# Altium PCB PCB2.PcbDoc
Units mil, origin at the board's own origin, x right, y up, seen from the top; angles counter-clockwise.
Board outline 3426.02 x 1894.97 mil, 2 copper layers (Top Layer, Bottom Layer); 18 components, 10 nets, 53 pads, 0 vias.
Unrouted connection lines stored in the file: 5.
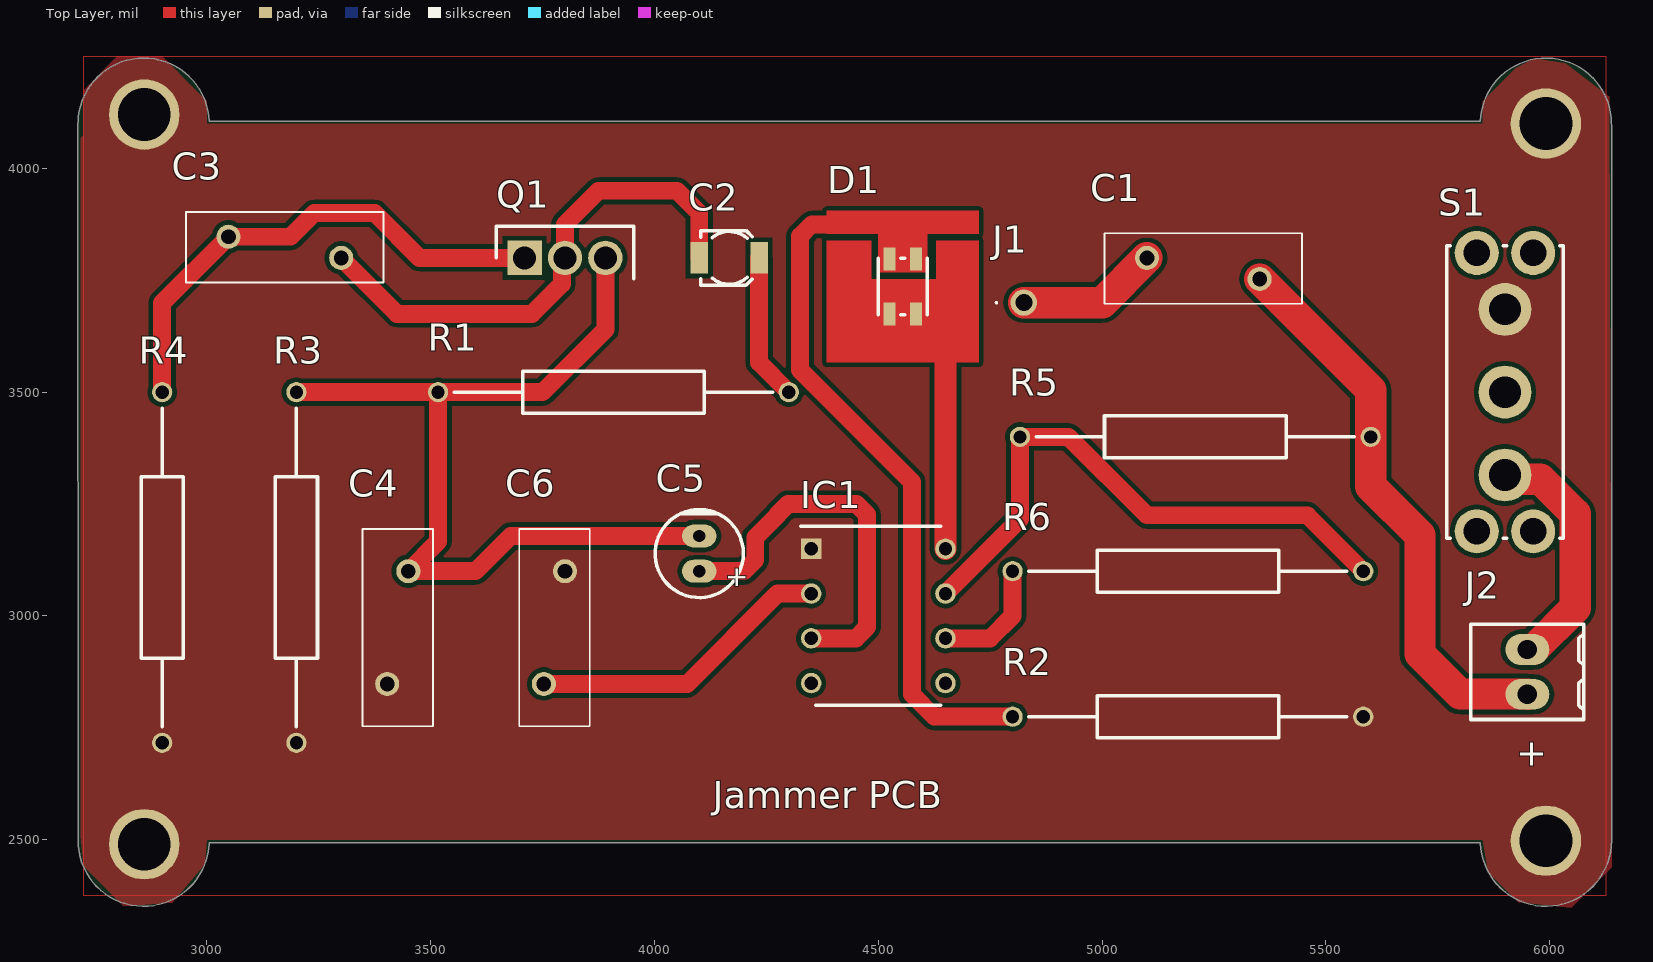
[diagram p0: Top Layer view]
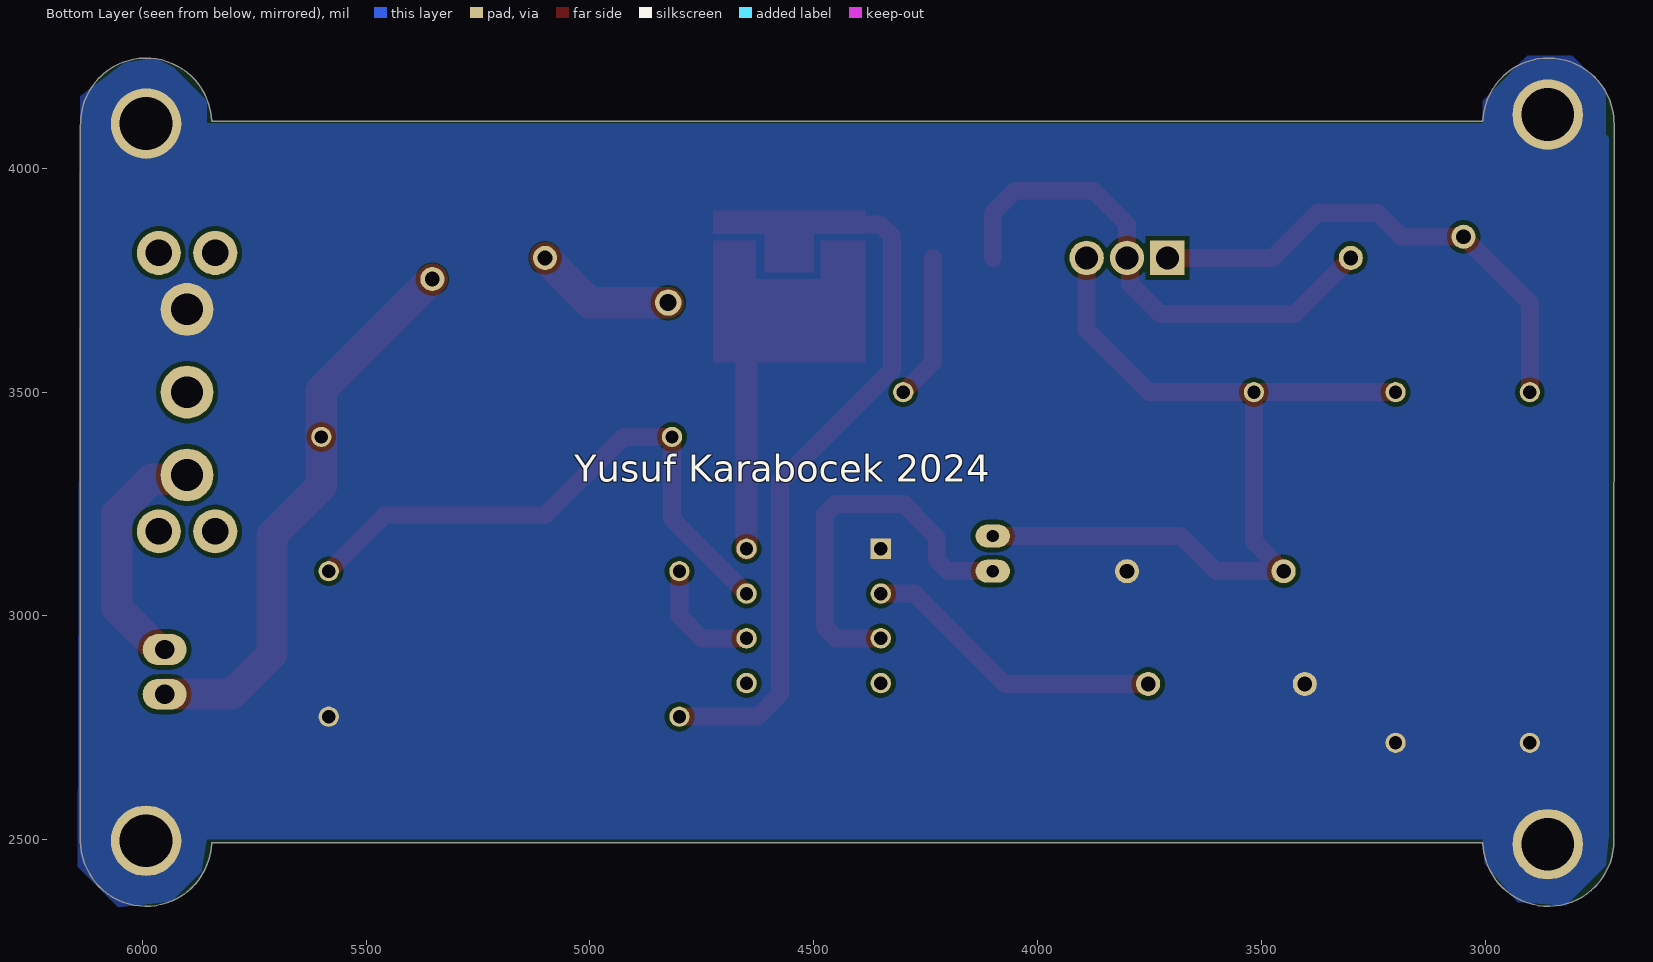
[diagram p1: Bottom Layer view, seen from below]
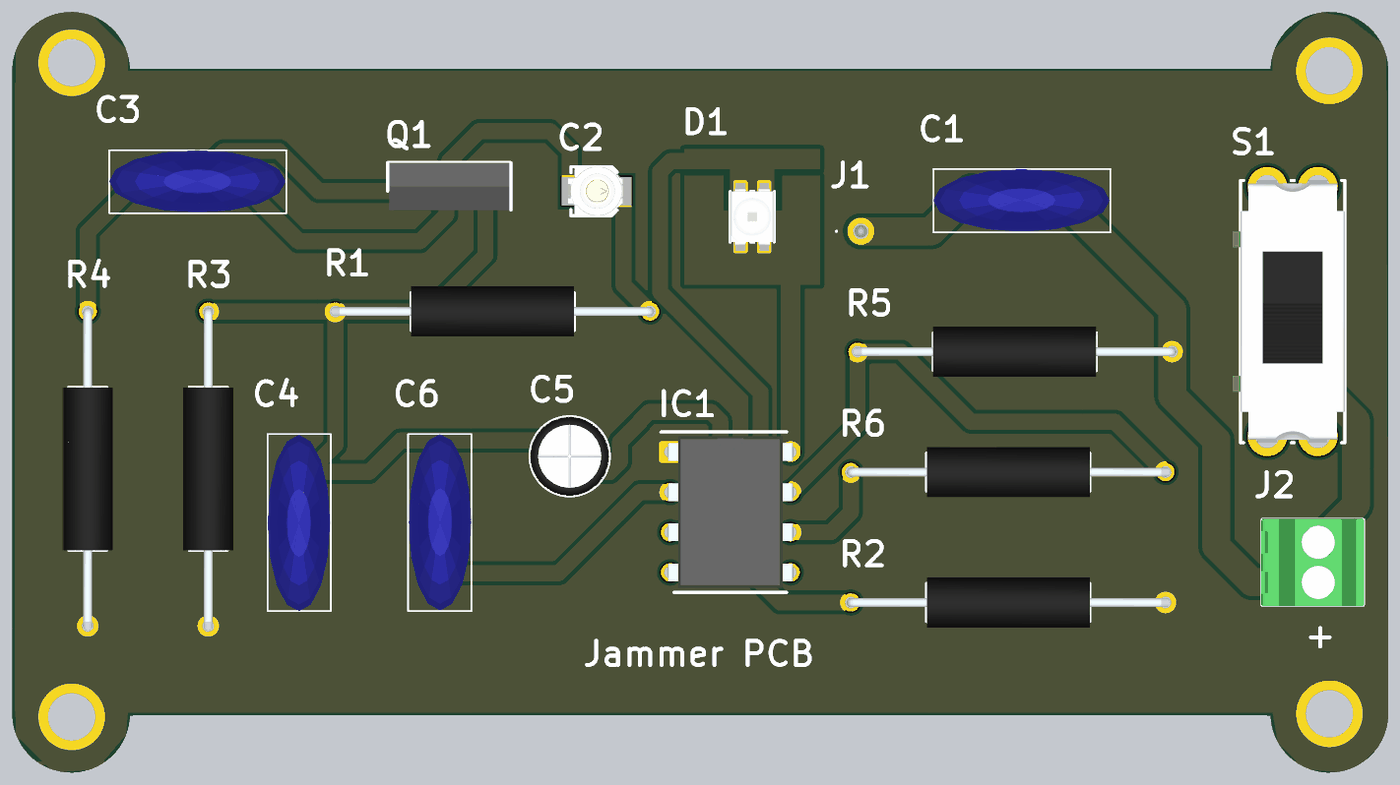
[diagram p2: 3D render of the assembled board from above, using the file's embedded part models]

## Layer stack, top to bottom
Top Solder: solder mask 0.4, Solder Resist, Dk 3.5
Top Layer: signal copper 1.4
Dielectric 1: dielectric 12.6, FR-4, Dk 4.8
Bottom Layer: signal copper 1.4
Bottom Solder: solder mask 0.4, Solder Resist, Dk 3.5

## Board outline
2712.14,2497.79 ccw(c2858.58,2497.79) 3004.93,2492.78 5845.23,2492.78 ccw(c5991.58,2497.79) 6138.01,2497.79 6138.01,4097.79 6137.86,4100 ccw(c5991.42,4100) 5845.07,4105.02 3004.93,4105.02 ccw(c2858.58,4100) 2712.19,4103.61 2711.99,4102.21

## Design rules (kind name [scope] priority, off if disabled: settings)
Clearance [All] p1: gap=10 ignorepadtopadclearanceinfootprint=FALSE except(0: Arc-Hole Track-Hole SMDPad-Hole THPad-Hole Via-Hole Fill-Hole Poly-Hole Region-Hole Text-Hole)
PolygonConnect [All] p1: connectstyle=Direct reliefconductorwidth=10 reliefentries=4 polygonreliefangle="90 Angle" airgapwidth=10
RoutingVias [All] p1: holewidth=28 width=50 viastyle="Through Hole" minholewidth=28 minwidth=50 maxholewidth=28 maxwidth=50
SolderMaskExpansion [All] p1: expansion=4 istentingtop=FALSE
Width [All] p1: maxlimit=100 minlimit=10 preferedwidth=10
30 further rules are at their usual default settings.

## Classes and differential pairs
component class Sheet1: C1 C2 C3 C4 C5 C6 D1 IC1 J1 Q1 R1 R2 R3 R4 R5 R6 S1

## Components (designator, comment, footprint, x,y, rotation, side; value= is the part's Value field where it differs from the comment)
C1 "4.7pF" 561R10TCCQ50 5100,3800 r0 top
C2 "JR300HV" "KNOWLES JR" 4166.93,3800 r180 top
C3 "2pF" 561R10TCCQ50 3048.03,3847.24 r0 top
C4 "47pF" 561R10TCCQ50 3402.76,2848.03 r90 top
C5 "1µF" "CAP TH ALUM ELEC D5.00mm S2.00mm H12.50mm" 4100,3139.37 r270 top
C6 "3.3pF" 561R10TCCQ50 3800,3100 r270 top
D1 "ASMT-QRBD-AEF0E" "Broadcom 4-PLLC 3228" 4554.53,3736.02 r0 top
IC1 "NE555N" DIP762W56P254L959H533Q8N 4500,3000 r0 top
J1 "Anten" M3902958360 4825,3700 r0 top
J2 "282834-2" "TE 282834-2" 5950,2875 r270 top
Q1 "2N4920G" TO229P300X760X1364-3P 3709.84,3800 r0 top
R1 "10k" RESAD1987W56L1031D239 3516.54,3500 r0 top
R2 "3.9k" RESAD1987W56L1031D239 5583.46,2775 r180 top
R3 "5.6k" RESAD1987W56L1031D239 3200,2716.54 r90 top
R4 "220" RESAD1987W56L1031D239 2900,2716.54 r90 top
R5 "6.8k" RESAD1987W56L1031D239 4816.54,3400 r0 top
R6 "82k" RESAD1987W56L1031D239 5583.46,3100 r180 top
S1 "MS12ASG13" "NKK MS12ASG13" 5900,3500 r90 top

## Footprints (in the part's own frame and the unit in brackets; to place one, negate y for a bottom-side part, rotate by r counter-clockwise, add the part's x,y. Pads: shape width x height; smd on the part's side, far side on the other; paste and mask are expansions set on the pad)
561R10TCCQ50 [mm]
  round 1.365 hole 0.84: 1(0,0) 2(6.4,-1.2)
  silkscreen extent -2.4,-2.6 8.8,1.4, body extent -2.41,-2.56 8.76,1.4, height 16.22
"Broadcom 4-PLLC 3228" [mm] "SOJ, 6-Leads, Body 3.20x2.80mm, IPC Medium Density"
  rect 0.7x1.3 smd paste-0.05 mask+0.1: 1(-0.75,-1.55) 1(0.75,-1.55) 2(-0.75,1.55) 2(0.75,1.55)
  Top Layer region: -1.4,0.8 1.4,0.8 1.4,3 4.3,3 4.3,4.3 -4.3,4.3 -4.3,3 -1.4,3
  Top Layer region: -4.3,2.6 -1.8,2.6 -1.8,0.4 1.9,0.4 1.9,2.6 4.3,2.6 4.3,-4.3 -4.3,-4.3
  silkscreen extent -1.4,-1.6 1.4,1.6, body extent -1.4,-1.8 1.4,1.8, height 2.1
"CAP TH ALUM ELEC D5.00mm S2.00mm H12.50mm" [mm] "5mm Diameter 2mm Lead Spacing Aluminum Electrolytic Capacitors Radial, Can"
  oval 1.3x1.95 hole 0.7: 1(1,0) 2(-1,0)
  silkscreen extent -2.5,-2.5 2.5,2.5, body extent -2.51,-2.5 2.5,2.5, height 12.5
DIP762W56P254L959H533Q8N [mm]
  rect 1.16x1.16 hole 0.76: 1(-3.81,3.81)
  round 1.16 hole 0.76: 2(-3.81,1.27) 3(-3.81,-1.27) 4(-3.81,-3.81) 5(3.81,-3.81) 6(3.81,-1.27) 7(3.81,1.27) 8(3.81,3.81)
  silkscreen extent -4.39,-5.08 3.55,5.08, body extent -3.95,-4.79 3.95,4.79, height 5.33
"KNOWLES JR" [mm] "CAP TRIMMER"
  rect 1x1.8 smd: 1(-1.7,0) 2(1.7,0)
  silkscreen extent -1.3,-1.55 1.63,1.55, body extent -1.65,-1.55 1.8,1.55, height 1.15
M3902958360 [mm]
  round 1.493 hole 0.96: 1(0,0)
  silkscreen extent -1.6,-0.05 -1.5,0.05, body extent -0.76,-0.77 0.76,0.77, height 5.87
"NKK MS12ASG13" [mm]
  round 3 hole 1.8: 1(-4.7,0) 2(0,0) 3(4.7,0)
  round 2.5 hole 1.5: M(-7.9,-1.6) M(-7.9,1.6) M(7.9,-1.6) M(7.9,1.6)
  silkscreen extent -8.3,-3.3 8.3,3.3, body extent -8.31,-3.3 8.31,3.81, height 13.41
RESAD1987W56L1031D239 [mm]
  round 1.15 hole 0.75: 1(0,0) 2(19.9,0)
  silkscreen extent 0.92,-1.19 18.97,1.19, body extent -0.28,-1.58 20.15,1.58, height 3.18
"TE 282834-2" [mm]
  oval 1.75x2.5 hole 1.1: 1(-1.27,0) 2(1.27,0)
  silkscreen extent -2.7,-3.2 2.7,3.2, body extent -2.77,-3.25 2.77,3.25, height 10
TO229P300X760X1364-3P [mm]
  rect 1.95x1.95 hole 1.3: 1(0,0)
  round 1.95 hole 1.3: 2(2.29,0) 3(4.58,0)
  silkscreen extent -1.61,-1.19 6.19,1.81, body extent -1.51,-1.19 6.09,1.81, height 12.76

## Part data
C1 C3 C4 C6: library part 561R10TCCQ50, "Capacitor", Manufacturer_Name=Vishay, Mouser Part Number=75-561R10TCCQ50, Datasheet Link=https://componentsearchengine.com/Datasheets/2/561R10TCCQ50.pdf, Height=11.2mm, Manufacturer_Part_Number=561R10TCCQ50, Mouser Price/Stock=https://www.mouser.co.uk/ProductDetail/Vishay-Cera-Mite/561R10TCCQ50?qs=XeJOwCSCkv8TfOZSduXdBA%3D%3D
C2: "CAP TRIMMER 5.5-30PF 350V SMD", Capacitance Range="5.5 ~ 30pF", Dielectric Material=Ceramic, manufacturer="Knowles Voltronics", Operating Temperature="-40°C ~ 85°C", Q @ Freq="200 @ 1MHz", Supplier Part Number 1=1674-JR300HV-ND, Adjustment Type=Top, componentlink1description=Datasheet, componentlink1url=https://www.knowlescapacitors.com/getattachment/727ef5bd-b9cf-4698-a84c-cd891d1f5273/JR-Series, componentlink2description="DigiKey Link", componentlink2url=https://www.digikey.com/en/products/detail/knowles-voltronics/JR300HV/17955420, Features="General Purpose", Height - Seated (Max)="0.045\" (1.15mm)", lastupdated="3.06.2024 20:26:22", Lifecycle Status=Active, Minimum Order=1, Mounting Type="Surface Mount", packaging=Bulk, Part Number=JR300HV, price=2.17, series=JR, Size / Dimension="0.138\" L x 0.122\" W (3.50mm x 3.10mm)", Supplier 1=DigiKey
C5: library part 860010772005, "CAP 1 UF 20% 63 V", Device Package="Radial, Can", Lifetime @ Temp.="2000 Hrs @ 85°C", manufacturer="Würth Elektronik", Operating Temperature="-40°C ~ 85°C", Ripple Current @ High Frequency="28.9mA @ 100kHz", Ripple Current @ Low Frequency="17mA @ 120Hz", Supplier Part Number 1=732-8762-1-ND, Tolerance=±20%, Voltage - Rated=63V, Applications="General Purpose", Capacitance=1µF, componentlink1description=Datasheet, componentlink1url=https://katalog.we-online.de/pbs/datasheet/860010772005.pdf, componentlink2description="DigiKey Link", componentlink2url=http://digikey.com/product-detail/en/w-rth-elektronik/860010772005/732-8762-1-ND/5728709, Height - Seated (Max)="0.492\" (12.50mm)", lastupdated="4.09.2020 23:29:02", Lead Spacing="0.079\" (2.00mm)", Lifecycle Status=Active, Minimum Order=1, Mounting Type="Through Hole", Package / Case="Radial, Can", packaging=TapeAndBox, Part Number=860010772005, Part Status=Active, partid=22163, Polarization=Polar, price=0.06, series=WCAP-ATG8, Size / Dimension="0.197\" Dia (5.00mm)", Supplier 1=DigiKey
D1: "LED INDICATOR 0.5W RED 4PLCC", Color=Red, Current - Max=300mA, Current - Test=150mA, Device Package=4-PLCC, Flux @ Current/Temperature - Test="16lm (12lm ~ 20lm)", Lumens/Watt @ Current - Test="43 lm/W", manufacturer="Broadcom Limited", Supplier Part Number 1=516-2679-1-ND, Temperature - Test=25°C, Voltage - Forward (Vf) (Typ)=2.5V, componentlink1description=Datasheet, componentlink1url=https://docs.broadcom.com/docs/AV02-1841EN, componentlink2description="DigiKey Link", componentlink2url=http://digikey.com/product-detail/en/broadcom-limited/ASMT-QRBD-AEF0E/516-2679-1-ND/3909187, Height - Seated (Max)="0.083\" (2.10mm)", lastupdated="24.04.2020 00:57:49", Lifecycle Status=Active, Minimum Order=1, Mounting Type="Surface Mount", Package / Case=4-PLCC, packaging=TapeAndReel, Part Number=ASMT-QRBD-AEF0E, Part Status=Active, price=0.42, Size / Dimension="0.126\" L x 0.110\" W (3.20mm x 2.80mm)", Supplier 1=DigiKey, Supplier Device Package=4-PLCC, Viewing Angle=120°, Wavelength="628nm (620nm ~ 635nm)"
IC1: "Integrated Circuit", Manufacturer_Name=HGSEMI, Datasheet Link=https://datasheet.lcsc.com/szlcsc/1906111919_HGSEMI-NE555N_C398063.pdf, Height=5.33mm, Manufacturer_Part_Number=NE555N
J1: library part M39029_58-360, "Connector", Arrow Part Number=M39029/58-360, Manufacturer_Name="TE Connectivity", Mouser Part Number=571-M39029/58-360, Arrow Price/Stock=https://www.arrow.com/en/products/m3902958-360/deutsch-group?region=nac, Datasheet Link=https://www.te.com/commerce/DocumentDelivery/DDEController?Action=showdoc&DocId=Customer+Drawing%7F204370%7FU%7Fpdf%7FEnglish%7FENG_CD_204370_U.pdf%7F204370-2, Height=13.6144mm, Manufacturer_Part_Number=M39029/58-360, Mouser Price/Stock=https://www.mouser.co.uk/ProductDetail/TE-Connectivity-DEUTSCH/M39029-58-360?qs=9HV4TyDAT3A%2FQtXMfnQD4Q%3D%3D
J2: "TERM BLK 2P SIDE ENT 2.54MM PCB", Color=Green, Current=10A, manufacturer="TE Connectivity AMP Connectors", Supplier Part Number 1=A98333-ND, Voltage=150V, componentlink1description=Datasheet, componentlink1url=https://www.te.com/commerce/DocumentDelivery/DDEController?Action=srchrtrv&DocNm=282834&DocType=Customer+Drawing&DocLang=English, componentlink2description="DigiKey Link", componentlink2url=http://digikey.com/product-detail/en/te-connectivity-amp-connectors/282834-2/A98333-ND/1150135, lastupdated="15.01.2020 04:15:38", Lifecycle Status=Active, Mating Orientation="Horizontal with Board", Minimum Order=1, Mounting Type="Through Hole", Number of Levels=1, packaging=Bulk, Part Number=282834-2, Part Status=Active, Pitch="0.100\" (2.54mm)", Positions Per Level=2, price=0.88, series=Buchanan, Supplier 1=DigiKey, Wire Gauge="16-30 AWG", Wire Termination="Screw - Rising Cage Clamp"
Q1: "Transistor BJT PNP", Manufacturer_Name=onsemi, Mouser Part Number=863-2N4920G, Arrow Part Number=2N4920G, Arrow Price/Stock=https://www.arrow.com/en/products/2n4920g/on-semiconductor, Datasheet Link=http://www.onsemi.com/pub/Collateral/2N4918-D.PDF, Height=3mm, Manufacturer_Part_Number=2N4920G, Mouser Price/Stock=https://www.mouser.co.uk/ProductDetail/ON-Semiconductor/2N4920G/?qs=vLkC5FC1VN9gzlxCmMsLdw%3D%3D
R1 R2 R3 R4 R5 R6: library part RS01A1R000FE12, "Resistor", Manufacturer_Name=Vishay, Mouser Part Number=71-RS01A1R000FE12, Arrow Part Number=RS01A1R000FE12, Arrow Price/Stock=https://www.arrow.com/en/products/rs01a1r000fe12/vishay?region=nac, Datasheet Link=http://www.mouser.com/ds/2/427/rsns-226497.pdf, Manufacturer_Part_Number=RS01A1R000FE12, Mouser Price/Stock=https://www.mouser.co.uk/ProductDetail/Vishay-Dale/RS01A1R000FE12?qs=pX8%252BLszEE6SqU%2F4VU%252B6gEw%3D%3D
S1: "SWITCH SLIDE SPDT 0.4VA 28V", Current Rating (Amps)="0.4VA (AC/DC)", manufacturer="NKK Switches", Operating Temperature="-30°C ~ 85°C", Supplier Part Number 1=360-2388-ND, Voltage Rating - AC="28 V", Actuator Length=5.10mm, Actuator Type=Standard, Circuit=SPDT, componentlink1description=Datasheet, componentlink1url=https://www.nkkswitches.com/pdf/MSnonilluminated.pdf, componentlink2description="DigiKey Link", componentlink2url=https://www.digikey.com/en/products/detail/nkk-switches/MS12ASG13/1052535, Contact Finish=Gold, Contact Material=Copper, Contact Timing="Non-Shorting (BBM)", Features="Epoxy Sealed Terminals", lastupdated="26.09.2022 03:18:31", Lifecycle Status=Active, Minimum Order=1, Mounting Type="Through Hole", packaging=Bulk, Part Number=MS12ASG13, Part Status=Active, partid=6, price=2.95, series=MS, Supplier 1=DigiKey, Switch Function=On-On, Termination Style="PC Pin", Voltage Rating - DC="28 V"

## Free pads (board coordinates)
  round 157.48 hole 118.11: ""(2860,2490) ""(2860,4120) ""(5991.42,4100) ""(5991.58,2497.79)

## Nets (pads, with @x,y where several pads share a name; then routed paths per layer and width w, separated by ;. In a path a pad name is that pad's centre, name@x,y a point inside that pad or via, vN(x,y) a via of type N, cw(c..) or ccw(c..) an arc to the next point about the centre after c; other vN are vias at no path point)
GND: C4.1 C6.1 IC1.1 pad. R2.1 R3.1 R4.1 S1.3
NetC1_1: C1.1 J1.1 | length 316.4
  Top Layer w70: J1.1 5000,3700 C1.1
NetC3_1: C3.1 Q1.1 R4.2 | length 1133.6
  Top Layer w40: R4.2 2900,3699.21 C3.1 3187,3847.24 3239.75,3900 3375,3900 3475,3800 Q1.1
NetC4_2: C4.2 C5.2 Q1.3 R1.1 R3.2 | length 2018.2
  Top Layer w40: R3.2 R1.1 ; Q1.3 3890.16,3640.16 3750,3500 R1.1 ; C5.2 3678.74,3178.74 3600,3100 C4.2 3516.54,3166.54 R1.1
NetC5_1: C5.1 IC1.3 | length 864
  Top Layer w40: C5.1 4200,3100 4225,3125 4225,3175 4275,3225 4275,3226.57 4298.43,3250 4451.57,3250 4475,3226.57 4475,2975 4450,2950 IC1.3
NetC6_2: C6.2 IC1.2 IC1.6 R6.2 | length 951.6
  Top Layer w40: C6.2 4073.03,2848.03 4275,3050 IC1.2 ; IC1.6 4750,2950 4800,3000 R6.2
NetD1_2: D1.2 R2.2 | length 1670.8
  Top Layer w40: 4559.06,3800 4558.43,3800 4552.83,3805.59 4552.83,3847.17 4525,3875 4351.47,3875 4325,3848.53 4325,3549.44 4575,3299.44 4575,2825 4625,2775 R2.2@4797.56,2775
NetJ2_1: J2.1 S1.1 | length 548.6
  Top Layer w70: S1.1 5909.21,3305.76 5979.45,3305.76 6057.2,3228 6057.2,3018.54 5963.66,2925 J2.1
NetR5_1: IC1.7 R5.1 R6.1 | length 1310.2
  Top Layer w40: IC1.7 4816.54,3216.54 R5.1 4925,3400 5100,3225 5458.46,3225 R6.1
VCC: C1.2 C2.1 C2.2 C3.2 D1.1 IC1.4 IC1.8 J2.2 Q1.2 R1.2 R5.2 | length 3361
  Top Layer w40: C3.2 3425,3675 3726.57,3675 3792.96,3741.4 3792.96,3792.96 Q1.2 3800,3875 3875,3950 4050,3950 4100,3900 C2.2 ; C2.1 4233.86,3566.14 R1.2
  Top Layer w50: 4530,3710 4650,3590 IC1.8
  Top Layer w70: C1.2 5600,3504.72 R5.2 5600,3290 5710,3180 5710,2915 5799.45,2825.55 5949.45,2825.55 J2.2
pads on no net: IC1.5 S1.2 S1.M

## Polygon pours and split planes (outlines as drawn)
GND on Top Layer "GND" (solid, pour order 6): 2725,4075 2725,4175 2800,4250 2900,4250 2975,4175 3000,4150 3000,4100 5850,4100 5850,4150 5925,4225 5967,4246 6034.48,4235.34 6133.28,4159.9 6138.18,2438.18 6048.5,2348.5 5930,2360 5862.76,2427.24 5850,2500 3000,2500 2995.15,2444.94 2922.03,2358.84 2814.62,2351.61 2725,2441.23 2718.43,2506.57 2718.43,4068.43
GND on Top Layer "GND" (none, shelved, pour order 4): 2725,4250 6125,4250 6125,2375 2725,2375
GND on Bottom Layer "GND" (solid, remove dead copper, pour order 8): 2730.42,4076.03 2730.42,4176.03 2805.42,4251.03 2905.42,4251.03 2980.42,4176.03 3005.42,4151.03 3005.42,4101.03 5855.42,4101.03 5855.42,4151.03 5930.42,4226.03 5972.42,4247.03 6039.9,4236.37 6138.7,4160.93 6143.6,2439.21 6053.93,2349.53 5935.42,2361.03 5868.18,2428.27 5855.42,2501.03 3005.42,2501.03 3000.57,2445.97 2927.45,2359.87 2820.04,2352.64 2730.42,2442.26 2723.85,2507.6 2723.85,4069.45

## Silkscreen, mask and mechanical layers (free items; w line width, h text height)
Top Overlay:
  text "+" at 5925,2665 h60
  text "Jammer PCB" at 4130,2570 h60
Bottom Overlay:
  text "Yusuf Karabocek 2024" at 5035,3300 h60
Mechanical 1:
  lines w10: 1362.16,5145 cw(c1503.58,5145) 1645,5145 ; 2717,2502.21 2717,4102.21 ; 2717.16,2497.79 ccw(c2858.58,2497.79) 3000,2497.79 5850.15,2497.79 ccw(c5991.58,2497.79) 6133,2497.79 6133,4097.79 ; 2717.16,4100 cw(c2858.58,4100) 3000,4100 5850,4100 cw(c5991.42,4100) 6132.84,4100

## Text inside footprints (layer, text, board x,y; h text height)
C5: Top Overlay "+" at 4149.21,3111.81 h78.74 r270